# Altium PCB driver.PcbDoc
Units mil, origin at the board's own origin, x right, y up, seen from the top; angles counter-clockwise.
Board outline 1401.57 x 1050 mil, 4 copper layers (Top, Layer 2, Layer 3, Bottom), stack 71.112 mil thick; 86 components, 50 nets, 252 pads, 64 vias.
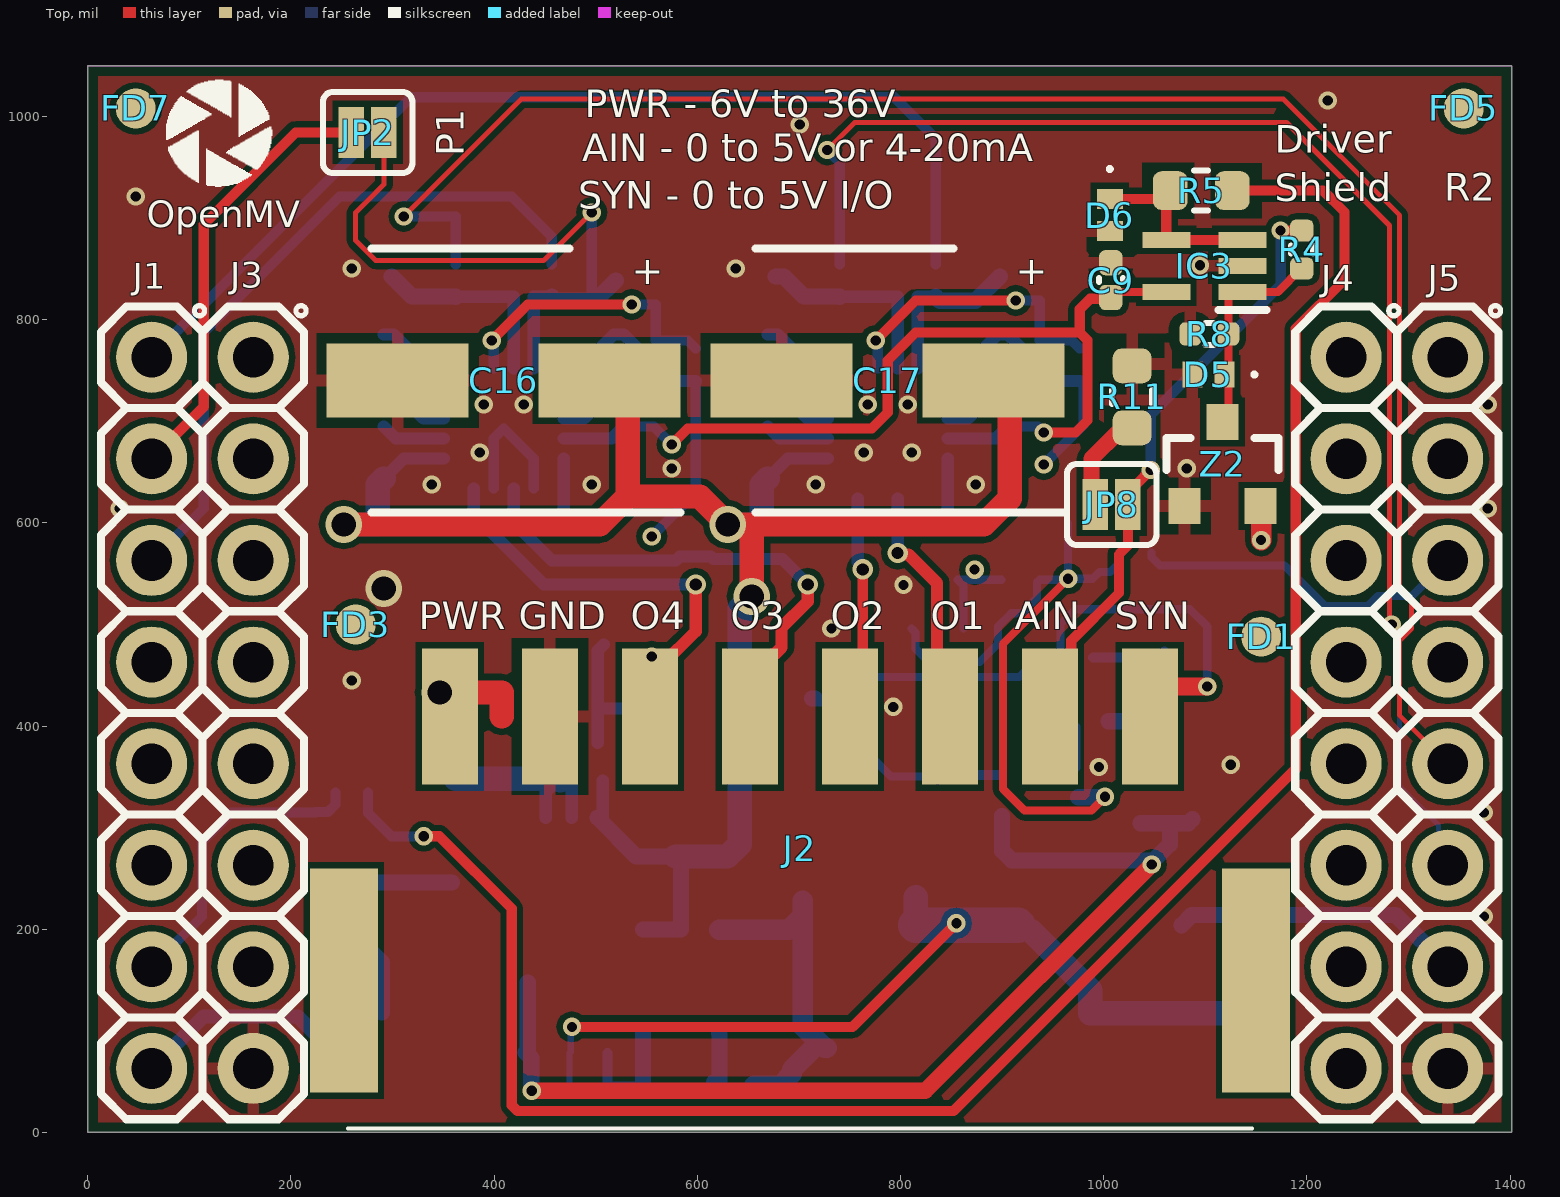
[diagram p0: Top view]
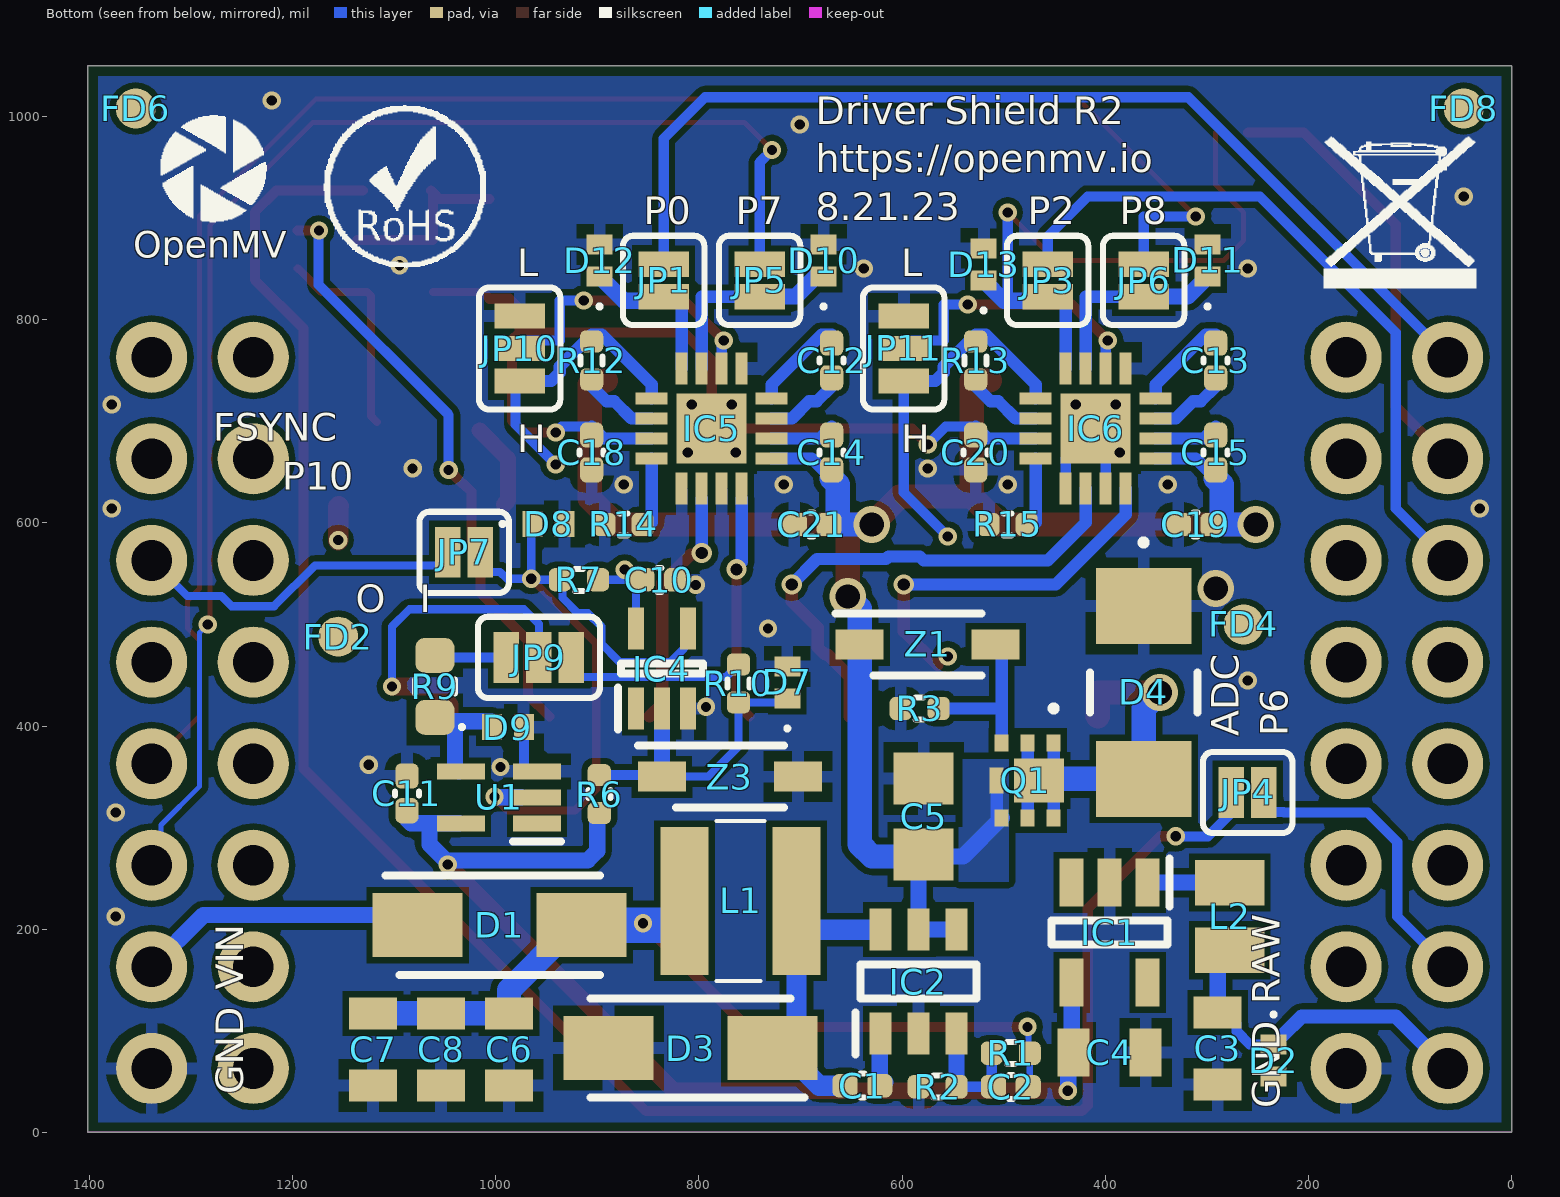
[diagram p1: Bottom view, seen from below]
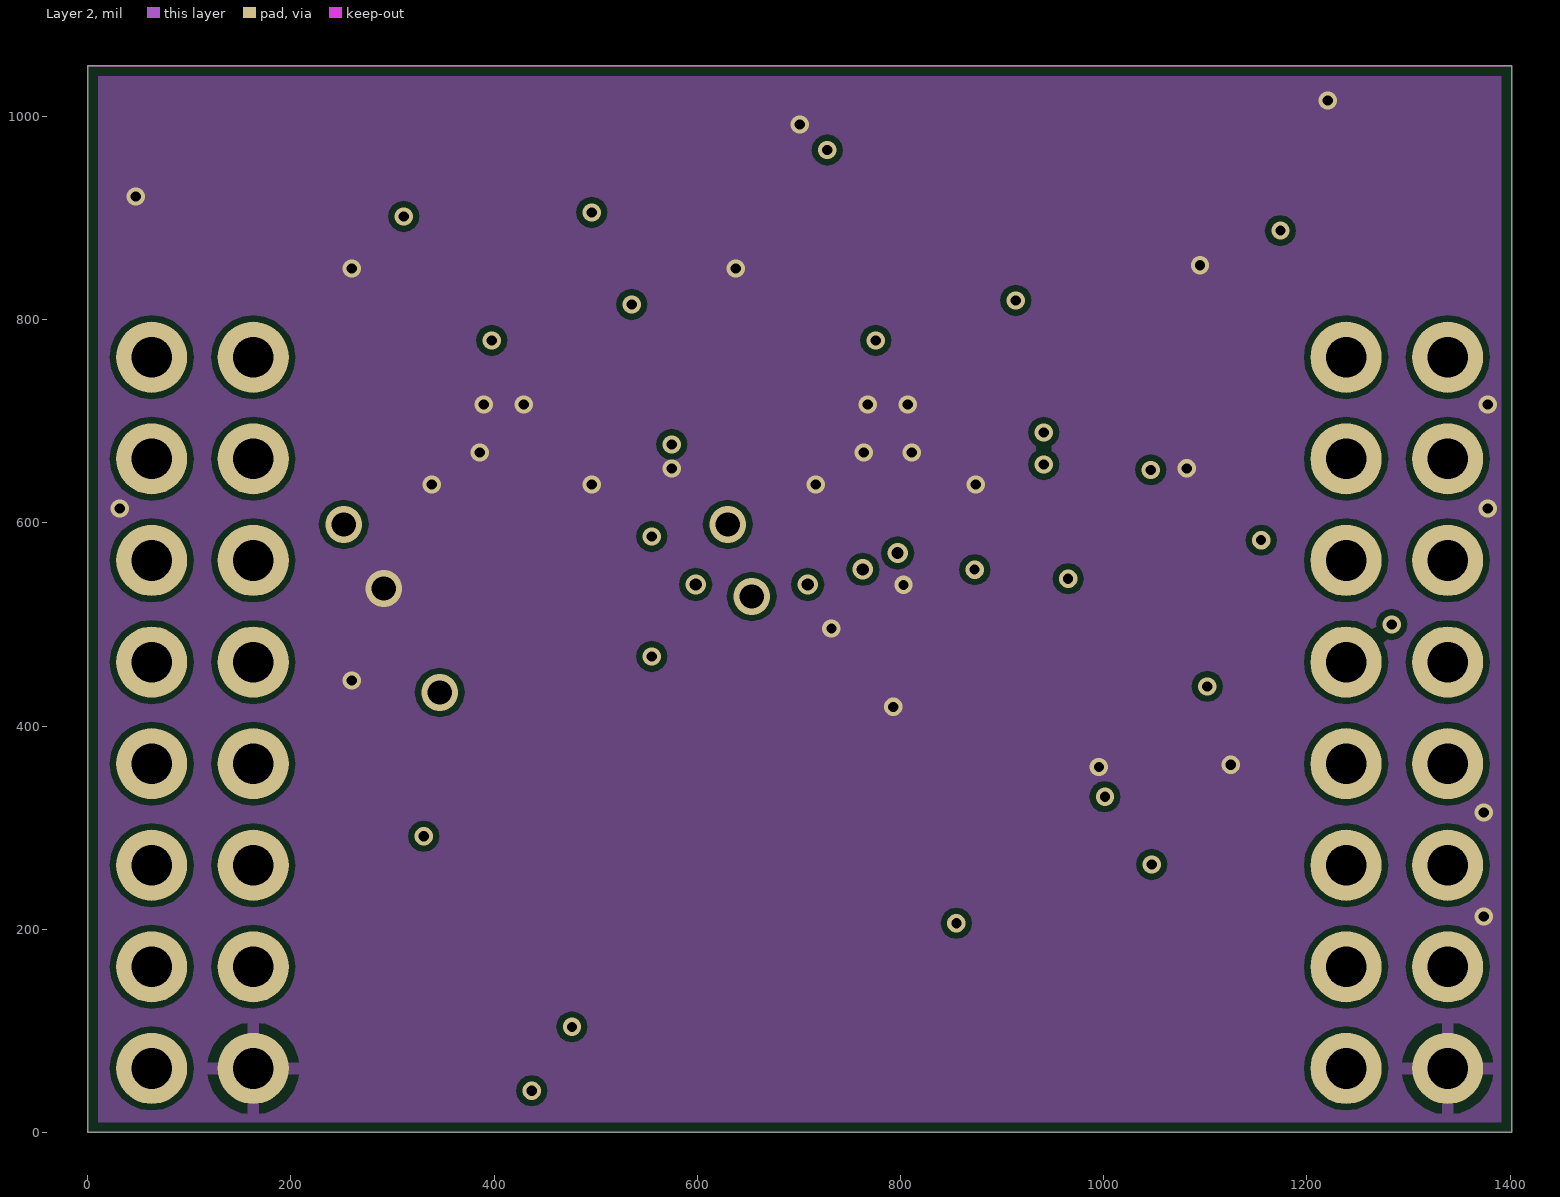
[diagram p2: Layer 2]
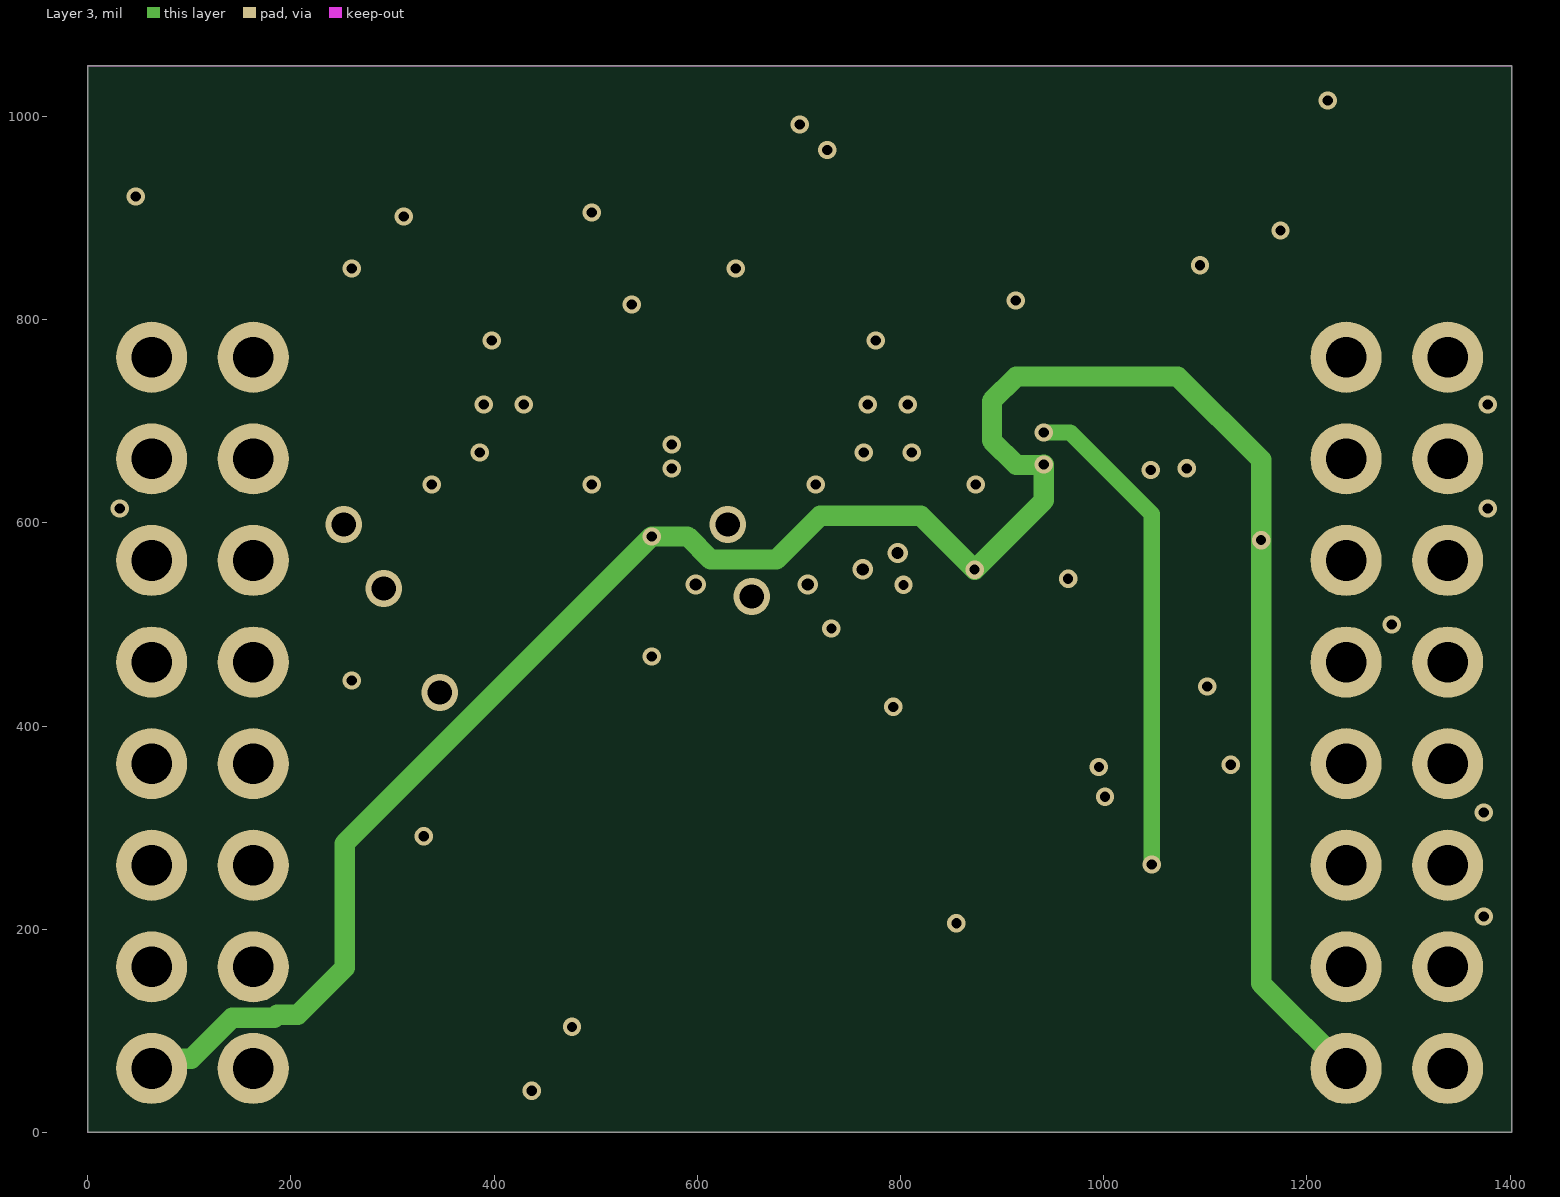
[diagram p3: Layer 3]
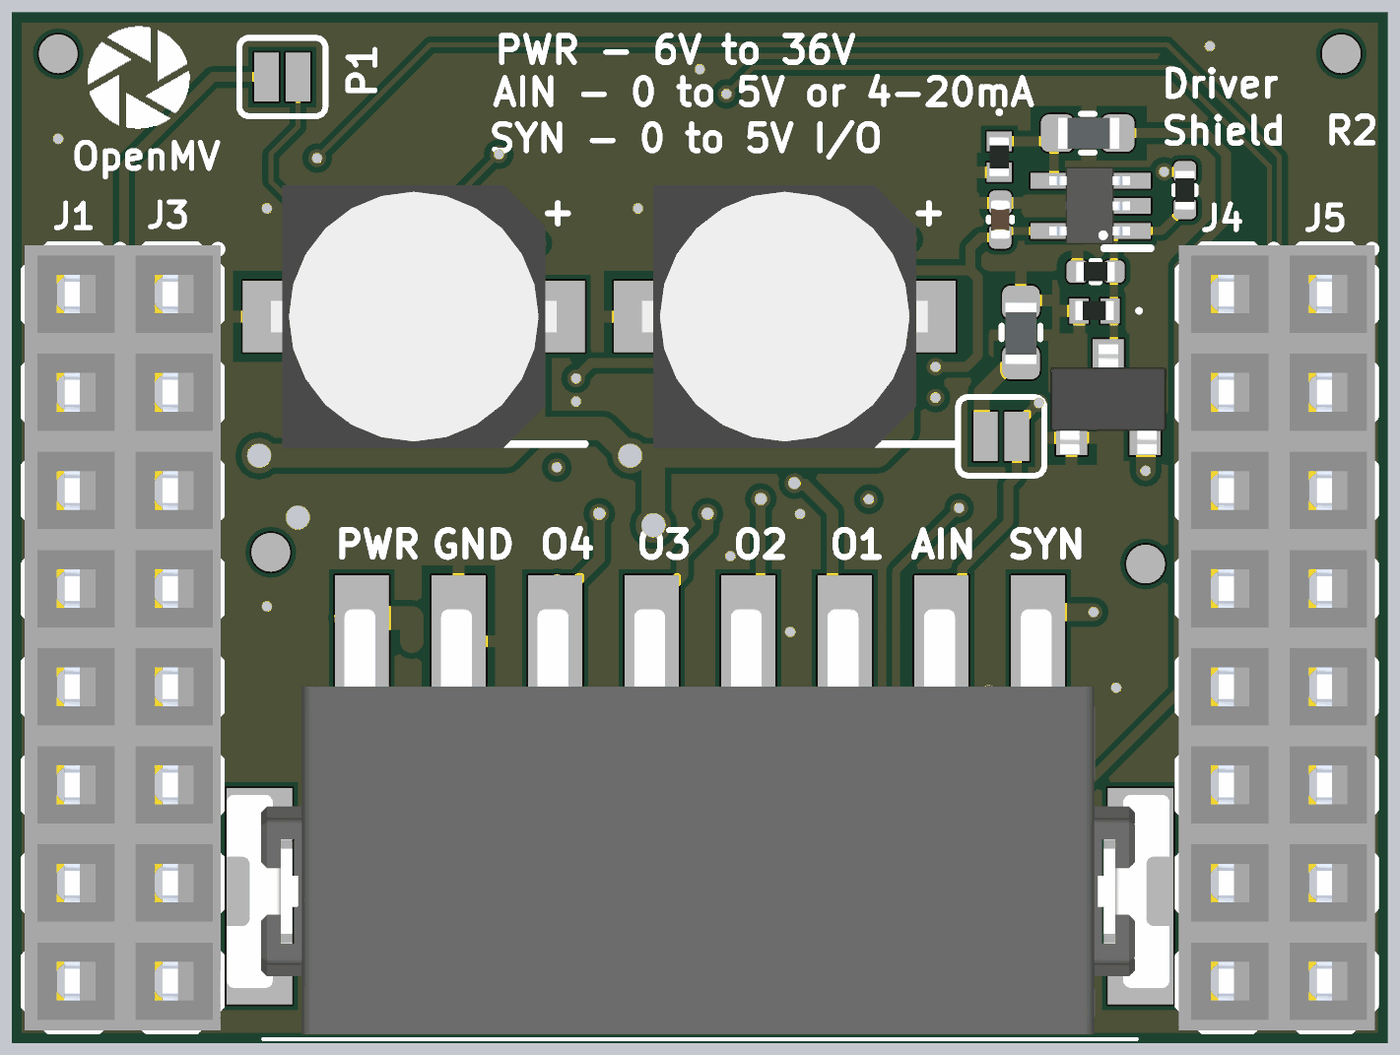
[diagram p4: 3D render of the assembled board from above, using the file's embedded part models]
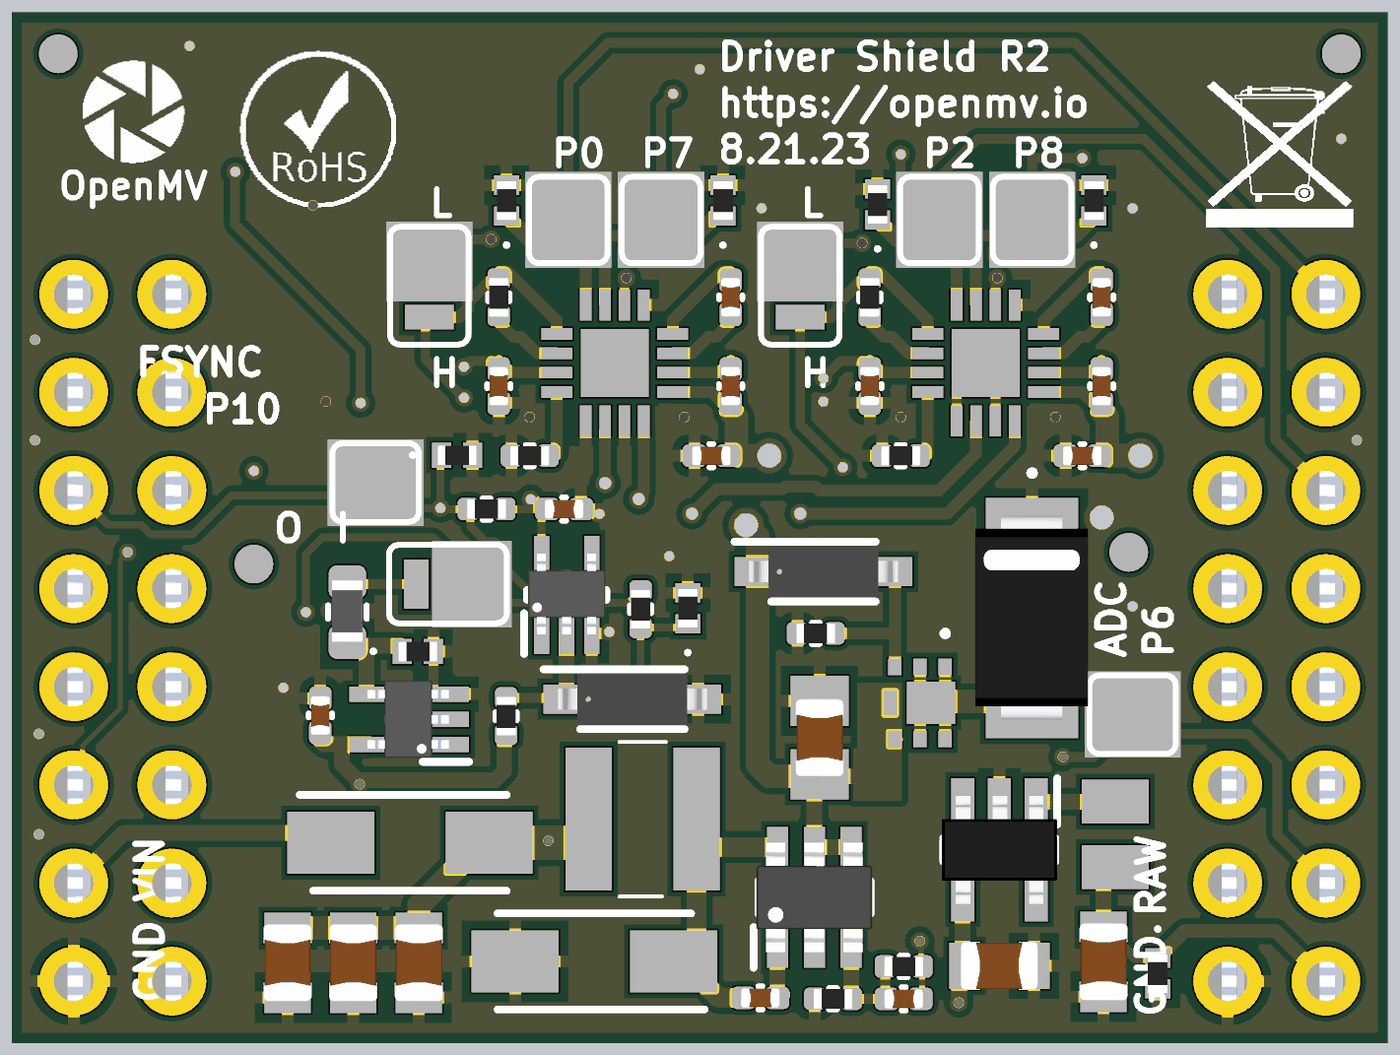
[diagram p5: 3D render of the assembled board from below, using the file's embedded part models]

## Layer stack, top to bottom
Top Solder: solder mask 0.4, Solder Resist, Dk 3.5
Top: signal copper 1.378
Dielectric 2: prepreg 2.8, PP-006, Dk 4.1
Layer 2: signal copper 1.378
Dielectric 1: dielectric 60, FR-4, Dk 4.8
Layer 3: signal copper 1.378
Dielectric 5: prepreg 2.8, PP-006, Dk 4.1
Bottom: signal copper 1.378
Bottom Solder: solder mask 0.4, Solder Resist, Dk 3.5

## Board outline
0,1050 0,0 1401.57,0 1401.57,1050

## Design rules (kind name [scope] priority, off if disabled: settings)
BoardOutlineClearance mdCopperDimension [All] p1: gap=10 ignorepadtopadclearanceinfootprint=FALSE except(0: Arc-SplitContinuation Track-SplitContinuation SMDPad-SplitContinuation THPad-SplitContinuation Via-SplitContinuation Fill-SplitContinuation Poly-SplitContinuation Region-SplitContinuation Text-SplitContinuation)
Clearance Clearance_for_PolygonClass_Isolate_6 [InPolygonClass('Isolate_6') vs IsArc Or IsTrack Or IsPad Or IsVia Or IsFill Or IsRegion Or IsText] p1: gap=6 ignorepadtopadclearanceinfootprint=FALSE
Clearance Clearance_for_NetClass_hipwr [InNetClass('hipwr') vs InNetClass('hipwr')] p2: gap=10 ignorepadtopadclearanceinfootprint=FALSE except(8: SMDPad-SMDPad)
Clearance [All] p3: gap=5 ignorepadtopadclearanceinfootprint=FALSE
ComponentClearance [not InComponent('J1')] p1: gap=0 collisioncheckmode=3 verticalgap=0 showdistances=FALSE
HoleSize HoleSize_For_NetClass_hipwr [InNetClass('hipwr')] p1: absolutevalues=TRUE maxlimit=10 minlimit=10 maxpercent=80.000 minpercent=20.000
HoleSize HoleSize_For_NetClass_signal [InNetClass('signal')] p2: absolutevalues=TRUE maxlimit=10 minlimit=10 maxpercent=80.000 minpercent=20.000
HoleSize HoleSize_For_NetClass_pwr [InNetClass('pwr')] p3: absolutevalues=TRUE maxlimit=10 minlimit=10 maxpercent=80.000 minpercent=20.000
HoleSize HoleSize_For_NetClass_gnd [InNetClass('gnd')] p4: absolutevalues=TRUE maxlimit=10 minlimit=10 maxpercent=80.000 minpercent=20.000
HoleSize [All] p5: absolutevalues=TRUE maxlimit=100000 minlimit=10 maxpercent=80.000 minpercent=20.000
HoleToHoleClearance mdDrill [All] p1: gap=10 allowstackedmicrovias=TRUE
MinimumSolderMaskSliver [All] p1 off: minsoldermaskwidth=10
PasteMaskExpansion Expansion_SMDPaste_OFF [InPadClass('SMDPaste_OFF')] p1: expansion=0
PasteMaskExpansion mlMinCreamFrame [All] p2: expansion=0
PolygonConnect PolygonConnect_For_PolygonThermal_OFF [InPolygonClass('PolygonThermal_OFF')] p1: connectstyle=Direct reliefconductorwidth=10 reliefentries=4 polygonreliefangle="90 Angle" airgapwidth=10
PolygonConnect PolygonConnect_For_PolygonThermal_ON_Width120000_Gap100000 [InPolygonClass('PolygonThermal_ON_Width120000_Gap100000') vs Not IsVia] p2: connectstyle=Relief reliefconductorwidth=12 reliefentries=4 polygonreliefangle="90 Angle" airgapwidth=10
PolygonConnect ThermalVias [IsVia] p3: connectstyle=Direct reliefconductorwidth=10 reliefentries=4 polygonreliefangle="90 Angle" airgapwidth=10
PolygonConnect [All] p4: connectstyle=Relief reliefconductorwidth=10 reliefentries=4 polygonreliefangle="90 Angle" airgapwidth=10
RoutingVias [All] p1: holewidth=10 width=18 viastyle="Through Hole" minholewidth=10 minwidth=18 maxholewidth=100 maxwidth=100
SolderMaskExpansion mlMinStopFrame [All] p1: expansion=2 istentingtop=FALSE
Width [All] p1: maxlimit=200 minlimit=5 preferedwidth=5 minimp=50.000000 maximp=50.000000 favimp=50.000000
25 further rules are at their usual default settings.

## Classes and differential pairs
polygon class PolygonThermal_OFF: Polygon_1_Net_EXT_VIN_INT
polygon class PolygonThermal_ON_Width120000_Gap100000: Polygon_1_Net_GND Polygon_2_Net_GND
polygon class Isolate_6: Polygon_1_Net_GND Polygon_2_Net_GND
pad class SMDPaste_OFF: FD1-1 FD2-1 FD3-1 FD4-1 FD5-1 FD6-1 FD7-1 FD8-1 JP1-1 JP1-2 JP2-1 JP2-2 JP3-1 JP3-2 JP4-1 JP4-2 JP5-1 JP5-2 JP6-1 JP6-2 JP7-1 JP7-2 JP8-1 JP8-2 JP9-1 JP9-2 JP9-3 JP10-1 JP10-2 JP10-3 JP11-1 JP11-2 JP11-3

## Components (designator, comment, footprint, x,y, rotation, side; value= is the part's Value field where it differs from the comment)
C1 "0.1uF" 0402-CAP 639,46 r0 bottom
C2 "100pF" 0402-CAP 493,45 r0 bottom
C3 "22uF" 0805 289.34,82.68 r90 bottom
C4 "22uF" 0805 395.64,78.74 r0 bottom
C5 "10uF" C0805 578.74,311.02 r90 bottom
C6 "22uF" 0805 986.87,81.74 r90 bottom
C7 "22uF" 0805 1120.72,81.74 r90 bottom
C8 "22uF" 0805 1053.8,81.74 r90 bottom
C9 "0.1uF" 0402-CAP 1007,839 r270 top
C10 "0.1uF" 0402-CAP 839,544 r0 bottom
C11 "0.1uF" 0402-CAP 1087.35,333.77 r270 bottom
C12 "22nF" 0402-CAP 669.29,759.84 r90 bottom
C13 "22nF" 0402-CAP 291.34,759.84 r90 bottom
C14 "0.1uF" 0402-CAP 669.29,669.29 r90 bottom
C15 "0.1uF" 0402-CAP 291.34,669.29 r90 bottom
C16 "EMZR500ARA101MF80G" CAPAE660X820N 409.45,740.16 r180 top
C17 "EMZR500ARA101MF80G" CAPAE660X820N 787.4,740.16 r180 top
C18 "0.1uF" 0402-CAP 905.51,669.29 r90 bottom
C19 "0.1uF" 0402-CAP 311.02,598.43 r180 bottom
C20 "0.1uF" 0402-CAP 527.56,669.29 r90 bottom
C21 "0.1uF" 0402-CAP 688.98,598.43 r180 bottom
D1 "FM240A" DIOM5025X231N 996,204 r180 bottom
D2 "CPDQT5V0HE-HF" CPDQT5V0HEHF 234.22,70.87 r270 bottom
D3 "FM240A" DIOM5025X231N 808.18,83.15 r0 bottom
D4 "SMAJ40CAE3_TR13" SMAJ40CAE3TR13 362.2,433.07 r270 bottom
D5 "CPDQT5V0HE-HF" CPDQT5V0HEHF 1103,746 r180 top
D6 "CPDQT5V0HE-HF" CPDQT5V0HEHF 1006,903 r270 top
D7 "CPDQT5V0HE-HF" CPDQT5V0HEHF 713,443 r90 bottom
D8 "CPDQT5V0HE-HF" CPDQT5V0HEHF 948,599 r180 bottom
D9 "CPDQT5V0HE-HF" CPDQT5V0HEHF 988,399 r180 bottom
D10 "CPDQT5V0HE-HF" CPDQT5V0HEHF 677.17,858.27 r90 bottom
D11 "CPDQT5V0HE-HF" CPDQT5V0HEHF 299.21,858.27 r90 bottom
D12 "CPDQT5V0HE-HF" CPDQT5V0HEHF 897.64,858.27 r90 bottom
D13 "CPDQT5V0HE-HF" CPDQT5V0HEHF 519.68,854.33 r90 bottom
FD1 "FIDUCIAL1X2" FIDUCIAL-1X2 1155,488 r0 top
FD2 "FIDUCIAL1X2" FIDUCIAL-1X2 1155,488 r180 bottom
FD3 "FIDUCIAL1X2" FIDUCIAL-1X2 263.78,500 r0 top
FD4 "FIDUCIAL1X2" FIDUCIAL-1X2 263.78,500 r180 bottom
FD5 "FIDUCIAL1X2" FIDUCIAL-1X2 1354.33,1007.87 r0 top
FD6 "FIDUCIAL1X2" FIDUCIAL-1X2 1354.33,1007.87 r180 bottom
FD7 "FIDUCIAL1X2" FIDUCIAL-1X2 47.24,1007.87 r0 top
FD8 "FIDUCIAL1X2" FIDUCIAL-1X2 47.24,1007.87 r180 bottom
IC1 "TPS613222ADBVR" SOT95P280X145-5N 395.64,196.85 r270 bottom
IC2 "AP64060WU-7" SOT95P280X100-6N 583.91,148.51 r90 bottom
IC3 "LM321LVIDCKR" SOT65P210X110-5N 1099,853 r180 top
IC4 "74LVC1G07GW,125" SOT65P212X110-5N 836.38,456.57 r90 bottom
IC5 "DRV8876RGTR" QFN50P300X300X100-17N 787.4,692.91 r180 bottom
IC6 "DRV8876RGTR" QFN50P300X300X100-17N 409.45,692.91 r180 bottom
J1 "SSQ-108-03-T-S" HDR_1X8 62.99,762.99 r0 top
J2 "1771088" 1771088 701,409.45 r0 top locked
J3 "SSQ-108-03-T-S" HDR_1X8 162.99,762.99 r0 top
J4 "SSQ-108-03-T-S" HDR_1X8 1238.58,762.99 r0 top
J5 "SSQ-108-03-T-S" HDR_1X8 1338.58,762.99 r0 top
JP1 "JUMPER-SMT_2_NC_PASTE_SILK" SMT-JUMPER_2_NC_PASTE_SILK 834.65,838.58 r270 bottom
JP2 "JUMPER-SMT_2_NO_SILK" SMT-JUMPER_2_NO_SILK 275.59,984.25 r0 top
JP3 "JUMPER-SMT_2_NC_PASTE_SILK" SMT-JUMPER_2_NC_PASTE_SILK 456.69,838.58 r270 bottom
JP4 "JUMPER-SMT_2_NC_PASTE_SILK" SMT-JUMPER_2_NC_PASTE_SILK 259.84,334.65 r0 bottom
JP5 "JUMPER-SMT_2_NC_PASTE_SILK" SMT-JUMPER_2_NC_PASTE_SILK 740.16,838.58 r270 bottom
JP6 "JUMPER-SMT_2_NC_PASTE_SILK" SMT-JUMPER_2_NC_PASTE_SILK 362.2,838.58 r270 bottom
JP7 "JUMPER-SMT_2_NC_PASTE_SILK" SMT-JUMPER_2_NC_PASTE_SILK 1031,571 r180 bottom
JP8 "JUMPER-SMT_2_NO_SILK" SMT-JUMPER_2_NO_SILK 1007.87,618.11 r0 top
JP9 "JUMPER-SMT_3_1-NC_PASTE_SILK" SMT-JUMPER_3_1-NC_PASTE_SILK 957.43,467.63 r180 bottom
JP10 "JUMPER-SMT_3_1-NC_PASTE_SILK" SMT-JUMPER_3_1-NC_PASTE_SILK 976.38,771.65 r90 bottom
JP11 "JUMPER-SMT_3_1-NC_PASTE_SILK" SMT-JUMPER_3_1-NC_PASTE_SILK 598.43,771.65 r90 bottom
L1 "NRS4018T100MDGJ" NRS4018T100MDGJ 759,228 r0 bottom
L2 "MAKK2016T2R2M" INDC2016X100N 277.53,212.6 r90 bottom
Q1 "BUK6D120-60PX" BUK6D12060PX 476.38,346.46 r90 bottom
R1 "133K" 0402-RES 493,78 r0 bottom
R2 "22.1K" 0402-RES 565,45.04 r0 bottom
R3 "100K" 0402-RES 582.68,417.32 r0 bottom
R4 "51K" 0402-RES 1195,869 r90 top
R5 "470" R0603 1097,927 r0 top
R6 "100K" 0402-RES 898,333 r90 bottom
R7 "100K" 0402-RES 918,544 r0 bottom
R8 "100K" 0402-RES 1104,786 r180 top
R9 "470" R0603 1059.79,440.07 r90 bottom
R10 "10K" 0402-RES 761,442 r90 bottom
R11 "240" R0603 1028,723 r270 top
R12 "100K" 0402-RES 905.51,759.84 r270 bottom
R13 "100K" 0402-RES 527.56,759.84 r270 bottom
R14 "1.69K" 0402-RES 874.02,598.43 r0 bottom
R15 "1.69K" 0402-RES 496.06,598.43 r0 bottom
U1 "74LVC1G17SE-7" SOT65P210X110-5N 996.8,329.83 r0 bottom
Z1 "MMSZ5231B-7-F" SOD3716X145N 574.8,480.32 r180 bottom
Z2 "BAT54S_R1_00001" SOT23-3 1117,656 r0 top
Z3 "MMSZ5231B-7-F" SOD3716X145N 769.45,350.27 r180 bottom

## Footprints (in the part's own frame and the unit in brackets; to place one, negate y for a bottom-side part, rotate by r counter-clockwise, add the part's x,y. Pads: shape width x height; smd on the part's side, far side on the other; paste and mask are expansions set on the pad)
0402-CAP [mm] "Chip Capacitor, 2-Leads, Body  0402 (in) 1005 (mm), IPC Medium Density"
  rrect52% 0.63x0.58 smd mask+0.05: 1(-0.435,0) 2(0.435,0)
  silkscreen extent -0.05,-0.3 0.05,0.3, body extent -0.5,-0.25 0.5,0.25, height 0.5
0402-RES [mm] "Chip Resistor, 2-Leads, Body  0402 (in) 1005 (mm), IPC Medium Density"
  rrect51% 0.55x0.58 smd mask+0.05: 1(-0.475,0) 2(0.475,0)
  silkscreen extent -0.1,-0.28 0.1,0.28, body extent -0.5,-0.25 0.5,0.25, height 0.34
0805 [mil] "0805"
  rect 31.5x47.24 smd: 1(-35.43,0) 2(35.43,0)
  body extent -39,-25 39,25, height 49
1771088 [mm] "1771088"
  rect 1.4x3.4 smd: 1(-8.75,0) 2(-6.25,0) 3(-3.75,0) 4(-1.25,0) 5(1.25,0) 6(3.75,0) 7(6.25,0) 8(8.75,0)
  rect 1.7x5.6 smd: 9(-11.4,-6.6) 10(11.4,-6.6)
  silkscreen extent -11.3,-10.3 11.3,-10.3, body extent -12.25,-10.18 12.15,0.82, height 5.1
BUK6D12060PX [mm] "BUK6D12060PX"
  rect 0.43x0.35 smd: 1(0.935,-0.65) 2(0.935,0) 3(0.935,0.65) 4(-0.935,0.65) 5(-0.935,0) 6(-0.935,-0.65)
  rect 1.1x1.25 smd: 7(0,-0.285)
  rect 0.66x0.35 smd: 8(0,0.775)
  silkscreen extent 1.75,-0.7 1.85,-0.6, body extent -1,-1 1,1, height 0.65
C0805 [mil] "C0805"
  rect 51.18x59.06 smd: 1(-37.4,0) 2(37.4,0)
  body extent -39,-25 39,25, height 49
CAPAE660X820N [mm] "CAPAE660X820N"
  rect 3.55x1.85 smd: 1(-2.65,0) 2(2.65,0)
  silkscreen extent -4.42,-3.3 3.3,3.3, body extent -3.7,-3.4 3.7,3.4, height 8.05
CPDQT5V0HEHF [mm] "CPDQT5V0HEHF"
  rect 0.5x0.65 smd: 1(-0.4,0) 2(0.4,0)
  silkscreen extent -1.2,-0.05 -1.1,0.05, body extent -0.5,-0.25 0.5,0.25, height 0.34
DIOM5025X231N [mil] "DIOM5025X231N"
  rect 88.58x62.99 smd: 1(-80.71,0) 2(80.71,0)
  silkscreen extent -112,-49 98,49, body extent -89,-48 89,50, height 79
FIDUCIAL-1X2 [mm] "FIDUCIAL-1X2"
  rrect100% 1x1 smd paste+0: 1(0,0)
HDR_1X8 [mil]
  round 70 hole 40: 1(0,0) 2(0,-100) 3(0,-200) 4(0,-300) 5(0,-400) 6(0,-500) 7(0,-600) 8(0,-700)
  silkscreen extent -50,-750 52,51, body extent -50,-750 50,50, height 335
INDC2016X100N [mm] "INDC2016X100N"
  rect 1.14x1.73 smd: 1(-0.847,0) 2(0.847,0)
  body extent -1,-0.8 1,0.8, height 1
NRS4018T100MDGJ [mm] "NRS4018T100MDGJ"
  rect 1.2x3.7 smd: 1(-1.4,0) 2(1.4,0)
  silkscreen extent -0.6,-2 0.6,2, body extent -2,-2 2,2, height 1.8
QFN50P300X300X100-17N [mil] "QFN50P300X300X100-17N"
  rect 31.5x11.81 smd: 1(-59.06,29.53) 2(-59.06,9.84) 3(-59.06,-9.84) 4(-59.06,-29.53) 9(59.06,-29.53) 10(59.06,-9.84) 11(59.06,9.84) 12(59.06,29.53)
  rect 11.81x31.5 smd: 5(-29.53,-59.06) 6(-9.84,-59.06) 7(9.84,-59.06) 8(29.53,-59.06) 13(29.53,59.06) 14(9.84,59.06) 15(-9.84,59.06) 16(-29.53,59.06)
  rect 68.9x68.9 smd: 17(0,0)
  body extent -59,-59 59,59, height 26
R0603 [mm] "R0603"
  rrect51% 0.87x0.97 smd mask+0.05: 1(-0.8,0) 2(0.75,0)
  silkscreen extent -0.2,-0.5 0.15,0.5, body extent -0.8,-0.4 0.8,0.4, height 0.45
SMAJ40CAE3TR13 [mm] "SMAJ40CAE3TR13"
  rect 1.9x2.39 smd: 1(-2.16,0) 2(2.16,0)
  silkscreen extent -3.8,-1.34 0.5,1.34, body extent -2.65,-1.47 2.63,1.45, height 2.41
SMT-JUMPER_2_NC_PASTE_SILK [mil] "SMT-JUMPER_2_NC_PASTE_SILK"
  rect 25x50 smd paste+0: 1(-16,0) 2(16,0)
  silkscreen extent -44,-40 44,40
SMT-JUMPER_2_NO_SILK [mil] "SMT-JUMPER_2_NO_SILK"
  rect 25x50 smd paste+0: 1(-16,0) 2(16,0)
  silkscreen extent -44,-40 44,40
SMT-JUMPER_3_1-NC_PASTE_SILK [mil] "SMT-JUMPER_3_1-NC_PASTE_SILK"
  rect 25x50 smd paste+0: 1(-32,0) 2(0,0) 3(32,0)
  silkscreen extent -60,-40 60,40
SOD3716X145N [mil] "SOD3716X145N"
  rect 47.24x29.53 smd: 1(-66.93,0) 2(66.93,0)
  silkscreen extent -91,-31 53,31, body extent -76,-27 76,27, height 32
SOT23-3 [mil] "SOT23-3"
  rect 31.5x35.43 smd: 1(-37.4,-39.37) 2(37.4,-39.37) 3(0,43.31)
  silkscreen extent -55,-4 55,28, body extent -59,-56 59,56, height 47
SOT65P210X110-5N [mm] "SOT65P210X110-5N"
  rect 1.2x0.4 smd: 1(-0.95,0.65) 2(-0.95,0) 3(-0.95,-0.65) 4(0.95,-0.65) 5(0.95,0.65)
  silkscreen extent -1.55,1.1 -0.35,1.1, body extent -1.02,-1 1.07,1, height 0.96
SOT65P212X110-5N [mm] "SOT65P212X110-5N"
  rect 1.05x0.4 smd: 1(-1,0.65) 2(-1,0) 3(-1,-0.65) 4(1,-0.65) 5(1,0.65)
  silkscreen extent -1.53,-1.02 0.12,1.1, body extent -1.02,-1 1.07,1, height 0.96
SOT95P280X100-6N [mil] "SOT95P280X100-6N"
  rect 41.34x21.65 smd: 1(-51.18,37.4) 2(-51.18,0) 3(-51.18,-37.4) 4(51.18,-37.4) 5(51.18,0) 6(51.18,37.4)
  silkscreen extent -72,-57 17,62, body extent -56,-59 56,59, height 44
SOT95P280X145-5N [mil] "SOT95P280X145-5N"
  rect 47.24x23.62 smd: 1(-49.21,37.4) 2(-49.21,0) 3(-49.21,-37.4) 4(49.21,-37.4) 5(49.21,37.4)
  silkscreen extent -73,-57 12,59, body extent -55,-59 55,59, height 46

## Part data
C1 C9 C10 C11 C14 C15 C18 C19 C20 C21: library part CAP0402-CAP, "CapacitorStandard 0603 ceramic capacitor, and 0.1\" leaded capacitor.", MPN=GRM155R71H104KE14D, DeviceName=0402-CAP, DeviceSetName=CAP, GateName_1=G$1, LibraryName=sfe, SymbolName_1=CAP
C2: library part CAP0402-CAP, "CapacitorStandard 0603 ceramic capacitor, and 0.1\" leaded capacitor.", MPN=CC0402JRNPO9BN101, DeviceName=0402-CAP, DeviceSetName=CAP, GateName_1=G$1, LibraryName=sfe, SymbolName_1=CAP
C3 C4 C6 C7 C8: library part 22UF-0805-6.3V-20%, "22ÂµF ceramic capacitors    A capacitor is a passive two-terminal electrical component used to store electrical energy temporarily in an electric field.", MPN=CL21A226MQQNNNE, DeviceName=-0805-6.3V-20%, DeviceSetName=22UF, GateName_1=G$1, LibraryName=SparkFun-Capacitors, PROD_ID=CAP-08402, SymbolName_1=CAP
C5: library part C-EUC0805, "CAPACITOR, European symbol", MPN=GRM21BR61H106KE43K, DeviceName=C0805, DeviceSetName=C-EU, GateName_1=G$1, LibraryName=rcl, POPULARITY=88, SPICEPREFIX=C, SymbolName_1=C-EU
C12 C13: library part CAP0402-CAP, "CapacitorStandard 0603 ceramic capacitor, and 0.1\" leaded capacitor.", MPN=GRM155R71H223KA12D, DeviceName=0402-CAP, DeviceSetName=CAP, GateName_1=G$1, LibraryName=sfe, SymbolName_1=CAP
C16 C17: "Aluminum Electrolytic Capacitors - SMD 100uF 50V 20%   Source:  Datasheet", MANUFACTURER_NAME=Chemi-Con, DeviceSetName=EMZR500ARA101MF80G, GateName_1=G$1, HEIGHT=8.2mm, LibraryName=EMZR500ARA101MF80G, MANUFACTURER_PART_NUMBER=EMZR500ARA101MF80G, MOUSER_PART_NUMBER=661-EMZR500ARA101MF8, MOUSER_PRICE-STOCK=https://www.mouser.co.uk/ProductDetail/United-Chemi-Con/EMZR500ARA101MF80G?qs=y6ZabgHbY%252ByQ3zUEIlMmqw%3D%3D, MPN=EMZR500ARA101MF80G, SymbolName_1=EMZR500ARA101MF80G
D1 D3: "Diodes - General Purpose, Power, Switching GP Si Rectifier SMB,2A,40V   Source:  Datasheet", MANUFACTURER_NAME=Rectron, DeviceSetName=FM240A, GateName_1=G$1, HEIGHT=2.31mm, LibraryName=FM240A, MANUFACTURER_PART_NUMBER=FM240A, MOUSER_PART_NUMBER=583-FM240A, MOUSER_PRICE-STOCK=https://www.mouser.co.uk/ProductDetail/Rectron/FM240A?qs=7pEAo90IqNG7sknZwmLYhQ%3D%3D, MPN=FM240A, SymbolName_1=FM240A
D2 D5 D6 D7 D8 D9 D10 D11 D12 D13: "ESD Suppressors / TVS Diodes DIODE ESD 5VWM 65W 0402/SOD-923F   Source:  Datasheet", MANUFACTURER_NAME="Comchip Technology", DeviceSetName=CPDQT5V0HE-HF, GateName_1=G$1, HEIGHT=0.42mm, LibraryName=CPDQT5V0HE-HF, MANUFACTURER_PART_NUMBER=CPDQT5V0HE-HF, MOUSER_PART_NUMBER=MOUSER_PART_NUMBER, MOUSER_PRICE-STOCK=MOUSER_PRICE-STOCK, MPN=CPDQT5V0HE-HF, SymbolName_1=CPDQT5V0HE-HF
D4: "ESD Suppressors / TVS Diodes TVS   Source:  Datasheet", MANUFACTURER_NAME=Microchip, MANUFACTURER_PART_NUMBER=SMAJ40CAe3/TR13, DeviceSetName=SMAJ40CAE3_TR13, GateName_1=G$1, HEIGHT=3.05mm, LibraryName=SMAJ40CAe3_TR13, MOUSER_PART_NUMBER=494-SMAJ40CAE3/TR13, MOUSER_PRICE-STOCK=https://www.mouser.co.uk/ProductDetail/Microchip-Technology/SMAJ40CAe3-TR13?qs=pU29NIZ4ZwCw3PnlxOleOw%3D%3D, MPN=SMAJ40CAe3/TR13, SymbolName_1=SMAJ40CAE3_TR13
FD1 FD2 FD3 FD4 FD5 FD6 FD7 FD8: "Fiducial Alignment Points    Point-of-reference for pick-and-place machines and other optical instruments.", DeviceName=1X2, DeviceSetName=FIDUCIAL, GateName_1=G$1, LibraryName=SparkFun-Aesthetics, SymbolName_1=FIDUCIAL
IC1: "6-uA Quiescent Current, 1.8-A Switch Current Boost Converter   Source:  Datasheet", MANUFACTURER_NAME="Texas Instruments", DeviceSetName=TPS613222ADBVR, GateName_1=G$1, HEIGHT=1.45mm, LibraryName=TPS613222ADBVR, MANUFACTURER_PART_NUMBER=TPS613222ADBVR, MOUSER_PART_NUMBER=595-TPS613222ADBVR, MOUSER_PRICE-STOCK=https://www.mouser.co.uk/ProductDetail/Texas-Instruments/TPS613222ADBVR?qs=W0yvOO0ixfE4d69WXsn8NQ%3D%3D, MPN=TPS613222ADBVR, SymbolName_1=TPS613222ADBVR
IC2: "Switching Voltage Regulators DCDC Conv HV Buck TSOT26(STD) T&R 3K   Source:  Datasheet", MANUFACTURER_NAME="Diodes Inc.", DeviceSetName=AP64060WU-7, GateName_1=G$1, HEIGHT=1mm, LibraryName=AP64060WU-7, MANUFACTURER_PART_NUMBER=AP64060WU-7, MOUSER_PART_NUMBER=621-AP64060WU-7, MOUSER_PRICE-STOCK=https://www.mouser.co.uk/ProductDetail/Diodes-Incorporated/AP64060WU-7?qs=Li%252BoUPsLEntiZYjFw%252BCbiQ%3D%3D, MPN=AP64060WU-7, SymbolName_1=AP64060WU-7
IC3: "1-Channel industry standard low voltage operational amplifier   Source:  Datasheet", MANUFACTURER_NAME="Texas Instruments", DeviceSetName=LM321LVIDCKR, GateName_1=G$1, HEIGHT=1.1mm, LibraryName=LM321LVIDCKR, MANUFACTURER_PART_NUMBER=LM321LVIDCKR, MOUSER_PART_NUMBER=595-LM321LVIDCKR, MOUSER_PRICE-STOCK=https://www.mouser.co.uk/ProductDetail/Texas-Instruments/LM321LVIDCKR?qs=qSfuJ%252Bfl%2Fd6RcyTOjkRx5Q%3D%3D, MPN=LM321LVIDCKR, SymbolName_1=LM321LVIDCKR
IC4: "74LVC1G07 - Buffer with open-drain output@en-us   Source:  Datasheet", MANUFACTURER_NAME=Nexperia, DeviceSetName=74LVC1G07GW,125, GateName_1=G$1, HEIGHT=1.1mm, LibraryName=74LVC1G07GW_125, MANUFACTURER_PART_NUMBER=74LVC1G07GW,125, MOUSER_PART_NUMBER=771-74LVC1G07GW-G, MOUSER_PRICE-STOCK=https://www.mouser.co.uk/ProductDetail/Nexperia/74LVC1G07GW125?qs=me8TqzrmIYW763Mg%2FG86Uw%3D%3D, MPN=74LVC1G07GW,125, SymbolName_1=74LVC1G07GW,125
IC5 IC6: "Motor / Motion / Ignition Controllers & Drivers 37-V, 3.5-A brushed DC motor driver with integrated current sensing and current sense output 16-VQFN -40 to 125   Source:  Datasheet", MANUFACTURER_NAME="Texas Instruments", DeviceSetName=DRV8876RGTR, GateName_1=G$1, HEIGHT=1mm, LibraryName=DRV8876RGTR, MANUFACTURER_PART_NUMBER=DRV8876RGTR, MOUSER_PART_NUMBER=595-DRV8876RGTR, MOUSER_PRICE-STOCK=https://www.mouser.co.uk/ProductDetail/Texas-Instruments/DRV8876RGTR?qs=T3oQrply3y%2F6lJwB3MIeHA%3D%3D, MPN=DRV8876RGTR, SymbolName_1=DRV8876RGTR
J1 J3 J4 J5: library part HDR_1X8, MANUFACTURER P/N=SSQ-108-03-T-S
J2: "PCB terminal block, nominal current: 6 A, rated voltage (III/2): 160 V, nominal cross section: 0.5 mm?, Number of potentials: 8, Number of rows: 1, Number of positions per row: 8, product range: PTSM 0,5/..-H-SMD, pitch: 2.5 mm, connection method: Push-in spring connection, mounting: SMD soldering, conductor/PCB connection direction: 0 ?, color: black, Pin layout: Linear pad geometry, type of packaging: packed in cardboard   Source:  Datasheet", MANUFACTURER_NAME="Phoenix Contact", DeviceSetName=1771088, GateName_1=G$1, HEIGHT=5.22mm, LibraryName=1771088, MANUFACTURER_PART_NUMBER=1771088, MOUSER_PART_NUMBER=651-1771088, MOUSER_PRICE-STOCK=https://www.mouser.co.uk/ProductDetail/Phoenix-Contact/1771088?qs=Q77YN%2FRrsKIDMojcNKtpFQ%3D%3D, MPN=1771088, SymbolName_1=1771088
JP1 JP3 JP4 JP5 JP6 JP7: "Normally closed solder jumper    This jumper has an aperture in the stencil to allow solder paste to bridge the split in the wire so it's normally closed (NC). Wick off the solder to open the connection. Reapply solder to reclose the connection.", DeviceName=_SILK, DeviceSetName=JUMPER-SMT_2_NC_PASTE, GateName_1=G$1, LibraryName=SparkFun-Jumpers, SymbolName_1=SMT-JUMPER_2_NC_PASTE
JP2 JP8: "Normally open jumper    This jumper has two pads in close proximity to each other. Apply solder to close the connection.   Round pads are easier to solder for beginners, but are a lot larger.   SparkFun Product that uses the round pads:  SparkFun EL Sequencer", DeviceName=_SILK, DeviceSetName=JUMPER-SMT_2_NO, GateName_1=G$1, LibraryName=SparkFun-Jumpers, SymbolName_1=SMT-JUMPER_2_NO
JP9 JP10 JP11: "Normally closed solder jumper (1 of 2 connections)    This jumper has an aperture in the stencil to allow solder paste to bridge one of the two connections. One connection is normally closed (NC), while the other is normally open (NO). Wick off the solder to open the connection. Reapply solder to reclose the connection. Apply solder to the other side instead to change the current path.", DeviceName=_SILK, DeviceSetName=JUMPER-SMT_3_1-NC_PASTE, GateName_1=G$1, LibraryName=SparkFun-Jumpers, SymbolName_1=SMT-JUMPER_3_1-NC_PASTE
L1: "Fixed Inductors 4018 10uH 180mOhms +/-20%Tol 1200mA   Source:  Datasheet", MANUFACTURER_NAME="TAIYO YUDEN", DeviceSetName=NRS4018T100MDGJ, GateName_1=G$1, HEIGHT=1mm, LibraryName=NRS4018T100MDGJ, MANUFACTURER_PART_NUMBER=NRS4018T100MDGJ, MOUSER_PART_NUMBER=963-NRS4018T100MDGJ, MOUSER_PRICE-STOCK=https://www.mouser.co.uk/ProductDetail/TAIYO-YUDEN/NRS4018T100MDGJ?qs=PzICbMaShUeiyHfvjt6KEw%3D%3D, MPN=NRS4018T100MDGJ, SymbolName_1=NRS4018T100MDGJ
L2: "INDUCTOR, METAL CORE Check availability", PACKAGE="2016 Taiyo Yuden", AVAILABILITY="In Stock", DeviceSetName=MAKK2016T2R2M, GateName_1=G$1, LibraryName=MAKK2016T2R2M, MF="Taiyo Yuden", MP=MAKK2016T2R2M, MPN=MAKK2016T2R2M, PRICE=None, PURCHASE-URL=https://pricing.snapeda.com/search/part/MAKK2016T2R2M/?ref=eda, SymbolName_1=MAKK2016T2R2M
Q1: "MOSFET 60V P-CH TRENCHMOS SOT1220   Source:  Datasheet", MANUFACTURER_NAME=Nexperia, DeviceSetName=BUK6D120-60PX, GateName_1=G$1, HEIGHT=0.65mm, LibraryName=BUK6D120-60PX, MANUFACTURER_PART_NUMBER=BUK6D120-60PX, MOUSER_PART_NUMBER=771-BUK6D120-60PX, MOUSER_PRICE-STOCK=https://www.mouser.co.uk/ProductDetail/Nexperia/BUK6D120-60PX?qs=F5EMLAvA7IBtoNC2L3hOcQ%3D%3D, MPN=BUK6D120-60PX, SymbolName_1=BUK6D120-60PX
R1: library part RESISTOR0402-RES, "ResistorBasic schematic elements and footprints for 0603, 1206, and PTH resistors.", MPN=RC0402FR-07133KL, DeviceName=0402-RES, DeviceSetName=RESISTOR, GateName_1=G$1, LibraryName=sfe, SymbolName_1=RESISTOR
R2: library part RESISTOR0402-RES, "ResistorBasic schematic elements and footprints for 0603, 1206, and PTH resistors.", MPN=CR0402-FX-2212GLF, DeviceName=0402-RES, DeviceSetName=RESISTOR, GateName_1=G$1, LibraryName=sfe, SymbolName_1=RESISTOR
R3 R6 R7 R8 R12 R13: library part RESISTOR0402-RES, "ResistorBasic schematic elements and footprints for 0603, 1206, and PTH resistors.", MPN=AC0402FR-07100KL, DeviceName=0402-RES, DeviceSetName=RESISTOR, GateName_1=G$1, LibraryName=sfe, SymbolName_1=RESISTOR
R4: library part RESISTOR0402-RES, "ResistorBasic schematic elements and footprints for 0603, 1206, and PTH resistors.", MPN=RC0402JR-0751KL, DeviceName=0402-RES, DeviceSetName=RESISTOR, GateName_1=G$1, LibraryName=sfe, SymbolName_1=RESISTOR
R5 R9: library part R-US_R0603, "RESISTOR, American symbol", MPN=CR0603-FX-4700ELF, DeviceName=R0603, DeviceSetName=R-US_, GateName_1=G$1, LibraryName=rcl, POPULARITY=77, SPICEPREFIX=R, SymbolName_1=R-US
R10: library part RESISTOR0402-RES, "ResistorBasic schematic elements and footprints for 0603, 1206, and PTH resistors.", MPN=AC0402FR-1310KL, DeviceName=0402-RES, DeviceSetName=RESISTOR, GateName_1=G$1, LibraryName=sfe, SymbolName_1=RESISTOR
R11: library part R-US_R0603, "RESISTOR, American symbol", MPN=RK73B1JTTD241J, DeviceName=R0603, DeviceSetName=R-US_, GateName_1=G$1, LibraryName=rcl, POPULARITY=77, SPICEPREFIX=R, SymbolName_1=R-US
R14 R15: library part RESISTOR0402-RES, "ResistorBasic schematic elements and footprints for 0603, 1206, and PTH resistors.", MPN=RC0402FR-07169RL, DeviceName=0402-RES, DeviceSetName=RESISTOR, GateName_1=G$1, LibraryName=sfe, SymbolName_1=RESISTOR
U1: "DiodesZetex 74LVC1G17SE-7, Buffer, Push-Pull, Non-Inverting, 1.65  5.5 V, 5-Pin SOT-353   Source:  Datasheet", MANUFACTURER_NAME="Diodes Inc.", DeviceSetName=74LVC1G17SE-7, GateName_1=G$1, HEIGHT=1.1mm, LibraryName=74LVC1G17SE-7, MANUFACTURER_PART_NUMBER=74LVC1G17SE-7, MOUSER_PART_NUMBER=621-74LVC1G17SE-7, MOUSER_PRICE-STOCK=https://www.mouser.co.uk/ProductDetail/Diodes-Incorporated/74LVC1G17SE-7?qs=FRHfhEBFk1dzIcstjqNcyA%3D%3D, MPN=74LVC1G17SE-7, SymbolName_1=74LVC1G17SE-7
Z1 Z3: "Zener Diode 5.1V 5% 500mW SOD123 Diodes Inc MMSZ5231B-7-F Zener Diode, 5.1V 5% 0.5 W SMT 2-Pin SOD-123   Source:  Datasheet", MANUFACTURER_NAME="Diodes Inc.", DeviceSetName=MMSZ5231B-7-F, GateName_1=G$1, HEIGHT=1.45mm, LibraryName=MMSZ5231B-7-F, MANUFACTURER_PART_NUMBER=MMSZ5231B-7-F, MOUSER_PART_NUMBER=621-MMSZ5231B-F, MOUSER_PRICE-STOCK=https://www.mouser.co.uk/ProductDetail/Diodes-Incorporated/MMSZ5231B-7-F?qs=2ygBApjwyeMh7Sf0YL1qSw%3D%3D, MPN=MMSZ5231B-7-F, SymbolName_1=MMSZ5231B-7-F

## Via types
v1: diameter 18/18/18/18 (per signal layer), hole 10, Top to Bottom, tented both sides, 32 vias
v2: diameter 18, hole 10, Top to Bottom, tented both sides, 23 vias
v3: diameter 36/36/36/36 (per signal layer), hole 24, Top to Bottom, tented both sides, 5 vias
v4: diameter 20/20/20/20 (per signal layer), hole 12, Top to Bottom, tented both sides, 4 vias

## Nets (pads, with @x,y where several pads share a name; then routed paths per layer and width w, separated by ;. In a path a pad name is that pad's centre, name@x,y a point inside that pad or via, vN(x,y) a via of type N, cw(c..) or ccw(c..) an arc to the next point about the centre after c; other vN are vias at no path point)
AIN: J2.7 JP8.2 R4.2 | length 594.1
  Top w10: J2.7 968.11,430.5 968.11,484.11 1015,531 1015,569 1023.87,577.87 JP8.2 1023.87,630.61 1031.37,638.11 1032.23,638.11 v2(1046.27,652.15) ; v2(1173.97,887.7) R4.2
  Bottom w10: v2(1046.27,652.15) 1046.27,706.27 1174.35,834.35 1174.35,887.31 v2(1173.97,887.7)
AIN_INT: D5.1 IC3.1 R4.1 R8.1 Z2.3 | length 210
  Top w8: Z2.3 1122.7,705.01 R8.1 1122.7,823.53 1126.58,827.41 IC3.1 1171.41,827.41 1194.3,850.3 R4.1
AIN_OUT: D6.1 IC3.3 IC3.4 R5.1 | length 182.2
  Top w10: D6.1 1055.29,918.75 R5.1@1061.6,925.06 ; R5.1@1063.54,927 R5.1@1061.6,925.06 ; IC3.3 IC3.4 R5.1@1061.6,925.06
AIN_S: JP8.1 R11.2 | length 86
  Top w16: JP8.1 987.94,622.05 987.94,663.13 R11.2@1015.75,690.94
CPH0: C12.1 IC5.11 | length 72.1
  Bottom w12: C12.1@669.29,734.25 683.88,719.66 691.56,719.66 708.47,702.76 IC5.11@728.35,702.76
CPH1: C13.1 IC6.11 | length 72.1
  Bottom w12: C13.1@291.34,734.25 305.93,719.66 313.61,719.66 330.52,702.76 IC6.11
CPL0: C12.2 IC5.12 | length 93.2
  Bottom w12: C12.2@669.29,785.43 679.13,785.43 728.35,736.22 IC5.12@728.35,722.44
CPL1: C13.2 IC6.12 | length 93.2
  Bottom w12: C13.2@291.34,785.43 301.18,785.43 350.39,736.22 IC6.12
EXT_VIN: D4.2 J2.1 Q1.1 Q1.2 Q1.5 Q1.6 Q1.7 | length 452.3
  Top w24: v3(346.46,433.07) 407.48,433.07 407.48,409.45
  Bottom w12: Q1.7@440.94,348.03 450.79,357.87 Q1.1 ; Q1.6 450.79,335.24 Q1.7@463.58,348.03 ; Q1.7 Q1.7@476.38,357.68 ; Q1.5 Q1.7@476.38,357.68 ; Q1.2 Q1.7@476.38,357.68
  Bottom w24: v3(346.46,433.07) 362.2,417.32 D4.2 440.94,348.03 463.58,348.03 Q1.7
EXT_VIN_BST: C1.1 IC2.1 | length 58.3
  Bottom w16: C1.1@616.58,49.42 618.46,49.42 C1.1 621.87,96.77 IC2.1
EXT_VIN_FB: C2.2 IC2.3 R1.2 R2.1 | length 123.5
  Bottom w10: R1.2 511.7,46.57 C2.2 545.69,45 R2.1@546.51,44.18
  Bottom w16: R2.1@546.51,44.18 IC2.3
EXT_VIN_G: Q1.3 R3.1 Z1.2 | length 154.6
  Bottom w12: Q1.3 501.97,417.32 ; Z1.2 501.97,474.41 501.97,425.2 501.97,417.32 ; R3.1@557.09,417.32 501.97,417.32
EXT_VIN_INT: C5.1 C14.1 C15.1 C16.1 C17.1 C19.2 C21.2 IC2.4 IC2.5 IC5.9 IC6.9 Q1.4 Q1.8 Z1.1 | length 1879.4
  Top w24: v3(251.97,598.43) 503.94,598.43 531.5,625.98 ; C16.1 531.5,740.16 531.5,625.98 ; v3(653.54,527.56) 653.54,598.43 ; C17.1 907.48,736.22 907.48,624.02 881.89,598.43 653.54,598.43 ; 531.5,625.98 602.36,625.98 v3(629.92,598.43) 653.54,598.43
  Bottom w12: C15.1@291.34,643.7 295.57,647.93 311.02,663.39 IC6.9 ; Q1.4 506.89,309.65 Q1.8 ; C14.1@669.29,643.7 688.98,663.39 IC5.9@728.35,663.39
  Bottom w16: Q1.4 539.96,271.65 578.74,271.65 583.91,266.48 IC2.5 IC2.4
  Bottom w24: v3(251.97,598.43) 285.43,598.43 285.43,637.8 C15.1@291.34,643.7 ; C5.1@578.74,271.65 629.65,271.65 641.73,283.73 Z1.1 641.73,515.75 v3(653.54,527.56) ; v3(629.92,598.43) 663.39,598.43 663.39,637.8 C14.1@669.29,643.7
EXT_VIN_OUT: C2.1 C6.2 C7.2 C8.2 D1.2 L1.2 R1.1 | length 847.8
  Top w10: v2(476.64,103.93) 752.93,103.93 v2(855,206)
  Bottom w6: C2.1 474.3,46.57 R1.1 475.47,79.17 475.47,102.75 v2(476.64,103.93)
  Bottom w24: L1.2@814.9,204 L1.2@814.9,231.56 ; D1.2@929,198 986.87,140.13 C6.2 C8.2 C7.2
  Bottom w35: L1.2@814.9,204 D1.2
EXT_VIN_SW: C1.2 D3.1 IC2.6 L1.1 | length 320.3
  Bottom w20: IC2.6 690.26,199.69 L1.1@703.88,213.31 ; C1.2 681.47,46 693.18,57.72 693.18,61.65 D3.1@714.68,83.15 ; L1.1 L1.1@703.88,213.31 ; D3.1 725.38,83.15 703.88,104.64 L1.1@703.88,213.31
GND: C3.1 C4.1 C5.2 C6.1 C7.1 C8.1 C9.1 C10.1 C11.1 C16.2 C17.2 C18.1 C19.1 C20.1 C21.1 D2.2 D3.2 D4.1 D5.2 D6.2 D7.2 D8.2 D9.2 D10.2 D11.2 D12.2 D13.2 IC1.2 IC2.2 IC3.2 IC4.3 IC5.5 IC5.7 IC5.13 IC5.17 IC6.5 IC6.7 IC6.13 IC6.17 J2.2 J3.8 J5.8 JP10.3 JP11.3 R2.2 R3.2 R8.2 R11.1 R14.2 R15.2 U1.3 Z2.1 Z3.2 | length 188.6
  Bottom w10: IC6.7 399.61,683.07 IC6.17 438.98,663.38 IC6.5 ; U1.3 968.4,355.42 972.25,359.27 D9.2
  other v1: 1374.02,212.6 1374.02,314.96 259.84,444.88 732,496 31.5,614.17 1377.95,614.17 574.8,653.54 385.83,669.29 763.78,669.29 811.02,669.29 389.76,716.54 429.13,716.54 767.72,716.54 807.09,716.54 1377.95,716.54 47.24,921.26 700.79,992.13 1220.47,1015.75
  other v2: 995.28,359.73 1125,362 792.91,418.92 803,539 338.58,637.8 496.06,637.8 716.54,637.8 874.02,637.8 1081.73,653.64 259.84,850.39 637.8,850.39 1094.7,853.55
  other v3: 291.34,535.43
IPROPI0: IC5.4 R14.1 | length 65.8
  Bottom w12: IC5.4 846.46,600.39 R14.1@848.43,598.43
IPROPI1: IC6.4 R15.1 | length 65.8
  Bottom w12: IC6.4 468.5,600.39 R15.1@470.47,598.43
NFAULT0: IC5.2 R12.2 | length 72.1
  Bottom w12: IC5.2 866.33,702.76 883.24,719.66 890.92,719.66 R12.2@905.51,734.25
NFAULT1: IC6.2 R13.2 | length 72.1
  Bottom w12: IC6.2 488.38,702.76 505.29,719.66 512.97,719.66 R13.2@527.56,734.25
OUT1: IC5.6 J2.6 | length 241.4
  Top w12: v4(797.16,570.41) 798.69,568.88 807.93,568.88 836,540.81 836,422.09 J2.6
  Bottom w12: v4(797.16,570.41) 797.24,570.49 IC5.6@797.24,624.1
OUT2: IC5.8 J2.5 | length 222
  Top w10: J2.5 762.94,422.18 v4(762.94,554.25)
  Bottom w12: IC5.8@757.87,624.1 757.87,561.49 762.94,556.42 v4(762.94,554.25)
OUT3: IC6.6 J2.4 | length 506.4
  Top w12: J2.4 651.79,448.82 673.35,470.38 675.97,470.38 683,477.41 683,497 708.66,522.66 v4(708.66,539.37)
  Bottom w12: IC6.6@419.29,633.86 419.29,600.39 456.69,562.99 578.74,562.99 582.68,566.93 613.33,566.93 615.84,564.43 683.61,564.43 v4(708.66,539.37)
OUT4: IC6.8 J2.3 | length 365.9
  Top w12: J2.3@565,460 598.43,493.43 v4(598.43,539.37)
  Bottom w12: IC6.8 379.92,608.27 448.82,539.37 v4(598.43,539.37)
  other v1: 555.12,468.5
P0_PWM: D12.1 IC5.16 JP1.2 | length 162.8
  Bottom w12: IC5.16 816.93,822.58 JP1.2
  Bottom w16: JP1.2 838.58,818.65 873.76,818.65 D12.1
P0_PWM_INT: J1.1 JP1.1 | length 1018.8
  Bottom w10: J1.1 62.99,763.78 318.21,1019 794,1019 834.65,978.35 JP1.1
P1_PWM_INT: J1.2 JP2.1 | length 434.8
  Top w10: J1.2 114.17,714.17 114.17,893.7 204.72,984.25 JP2.1
P2_PWM_INT: J1.3 JP3.1 | length 687.2
  Bottom w10: J1.3 114.17,614.17 114.17,787.4 248.03,921.26 417.32,921.26 456.69,881.89 JP3.1
P6_ADC: JP4.2 R5.2 | length 1991.3
  Top w10: v1(330.71,291.63) 346.17,291.63 417.32,220.47 417.32,26.86 423.18,21 852,21 1189,358 1189,791 1237,839 1237,906 1216,927 R5.2@1130.46,927
  Bottom w10: JP4.2 275.84,314.71 299.21,291.34 330.71,291.34 v1(330.71,291.63)
P6_ADC_INT: J1.7 JP4.1 | length 301.8
  Bottom w10: J1.7 112.6,212.6 112.6,285.83 141.73,314.96 224.15,314.96 224.48,315.29 236.34,315.29 243.84,322.79 JP4.1
P7_PWM: D10.1 IC5.15 JP5.2 | length 198.9
  Bottom w12: JP5.2 797.24,822.58 IC5.15
  Bottom w16: D10.1 685.04,842.52 704.72,822.83 739.91,822.83 JP5.2
P7_PWM_INT: J5.6 JP5.1 | length 1377.3
  Top w5: v1(728,967) 755,994 1180,994 1281.34,892.66 1281.34,502.13 v1(1283.46,500)
  Bottom w5: v1(1283.46,500) 1291.34,492.13 1291.34,340.7 1329.48,302.56 1329.48,272.09 J5.6
  Bottom w10: v1(728,967) 740.16,954.84 JP5.1
P8_PWM: D11.1 IC6.15 JP6.2 | length 198.9
  Bottom w12: JP6.2 419.29,822.58 IC6.15
  Bottom w16: D11.1 318.9,822.83 361.95,822.83 JP6.2
P8_PWM_INT: J5.5 JP6.1 | length 1742.7
  Top w5: v1(311.02,901.57) 426.43,1017 1177,1017 1291.34,902.66 1291.34,535.43 1303.15,523.62 1303.15,496.06 1291.34,484.25 1291.34,410.24 J5.5
  Bottom w10: v1(311.02,901.57) 362.2,901.57 JP6.1
P10_FSYNC: D8.1 IC4.4 JP7.2 R7.2 U1.2 | length 728.2
  Top w8: v2(965,545) 901,481 901,338 922,317 987.85,317 v2(1001.23,330.39) v2@1000,331.62
  Bottom w8: IC4.4 814.66,492.06 814.66,476.33 828,463 878,463 896,481 896,498 909,511 919,511 934.36,526.36 934.36,541.66 R7.2 964,544 v2(965,545) ; D8.1@965,600 v2(965,545) ; JP7.2 1015,560.26 1006.5,551.76 995.76,551.76 989,545 v2(965,545)
  Bottom w16: U1.2@975.02,329.83 1000.13,329.83 1000.69,330.39 v2(1001.23,330.39)
P10_FSYNC_INT: J5.3 JP7.1 | length 334.8
  Bottom w8: JP7.1 1047,566.5 1055.5,558 1178,558 1218,518 1260,518 1270,528 1303.59,528 J5.3
P12_PWM: D13.1 IC6.16 JP2.2 JP3.2 | length 628.2
  Top w5: JP2.2 291.59,933.32 263.78,905.51 263.78,877.95 283.46,858.27 448.82,858.27 v1(496.06,905.51)
  Bottom w10: 496.06,818.65 v1(496.06,905.51)
  Bottom w12: IC6.16 438.98,822.58 JP3.2
  Bottom w16: JP3.2 456.69,818.65 496.06,818.65 499.75,818.65 D13.1
PMODE0: IC5.14 JP10.2 | length 288.1
  Top w10: v1(775.59,779.53) 814.96,818.9 v1(913.39,818.9)
  Bottom w10: v1(775.59,779.53) 777.56,777.56 IC5.14 ; v1(913.39,818.9) 937.01,818.9 937.01,779.53 968.5,779.53 JP10.2
PMODE1: IC6.14 JP11.2 | length 282.5
  Top w10: v1(397.64,779.53) 433.07,814.96 v1(535.43,814.96)
  Bottom w10: v1(397.64,779.53) 399.61,777.56 IC6.14 ; v1(535.43,814.96) 559.06,814.96 559.06,779.53 590.55,779.53 JP11.2
SW: IC1.1 L2.2 | length 80.8
  Bottom w16: L2.2@277.53,245.94 358.12,245.94 IC1.1
SYNC: J2.8 JP9.2 | length 324.6
  Top w18: J2.8 1045.49,420.44 1064.05,439 v2(1102,439)
  Bottom w8: JP9.2 957.43,500.43 972,515 1085,515 1102,498 v2(1102,439)
SYNC_IN: JP9.3 R10.2 | length 183.9
  Bottom w8: R10.2 773.41,448.29 906.09,448.29 906.19,448.39 916.93,448.39 925.43,456.89 JP9.3
SYNC_IN_INT: D7.1 IC4.2 R6.2 R10.1 Z3.1 | length 304.2
  Bottom w8: D7.1@719.9,423.3 R10.1 761,380 790.73,350.27 Z3.1
  Bottom w10: Z3.1 837.81,351.7 R6.2
  Bottom w16: D7.1 D7.1@715.95,427.25 ; Z3.1 IC4.2
SYNC_OUT: JP9.1 R9.2 | length 72.8
  Bottom w10: JP9.1 1053.89,467.63 R9.2@1059.79,473.53
SYNC_OUT_INT: D9.1 R9.1 U1.4 | length 106.8
  Bottom w16: D9.1@1004.67,404.64 1040.1,404.64 ; U1.4@1036.17,355.43 1040.1,359.36 1040.1,404.64 ; R9.1@1059.79,406.61 1057.82,404.64 1040.1,404.64
V_BATT: C4.2 C9.2 C11.2 C18.2 C20.2 IC1.4 IC3.5 IC5.3 IC6.3 R6.1 U1.5 | length 2528
  Top w8: C9.2@1012.54,827.41 IC3.5
  Top w10: v1(574.8,677.17) 590.55,692.91 771.65,692.91 787.4,708.66 787.4,759.84 814.96,787.4 976.38,787.4 ; v1(940.94,688.98) 972.28,688.98 984.09,700.79 984.09,779.68 976.38,787.4 ; C9.2@1012.54,827.41 C9.2 1005.79,820.66 986.66,820.66 976.38,810.38 976.38,787.4
  Top w16: v2(437,41) 824.46,41 v2(1047.24,263.78)
  Layer 3 w16: v1(940.94,688.98) 967.02,688.98 1047.24,608.76 v2(1047.24,263.78)
  Bottom w10: C20.2@527.56,694.88 557.09,694.88 v1(574.8,677.17) ; C18.2@905.51,694.88 935.04,694.88 v1(940.94,688.98)
  Bottom w12: IC6.3 515.75,683.07 C20.2@527.56,694.88 ; IC5.3 893.7,683.07 C18.2@905.51,694.88
  Bottom w16: IC1.4 433.04,80.71 C4.2 436.53,73.29 436.53,42.02 437,41.54 v2(437,41) ; R6.1@900,311.47 900,277.15 909.37,267.78 1049.42,267.78 1065.17,283.53 1065.17,301.24 ; U1.5@1036.17,304.24 1083.41,304.24 C11.2@1087.35,308.18
VCC: C3.2 C10.2 D2.1 IC4.5 IC5.1 IC6.1 J1.8 J4.8 JP10.1 JP11.1 L2.1 R7.1 R12.1 R13.1 Z2.2 | length 3449
  Top w20: Z2.2 1155,616.03 v2(1155,583)
  Layer 3 w10: J1.8 J1.8@73.99,62.99
  Layer 3 w20: J1.8 72.56,72.56 101.85,72.56 142.28,112.99 183.7,112.99 186.71,116 207,116 253,162 253,284.49 v1(555.12,586.61) 590.39,586.61 613,564 678,564 721,607 820,607 v2(873,554) 940.94,621.94 v1(940.94,657.48) 940.46,657 914,657 890,681 890,720 914,744 1073,744 1155,662 v2(1155,583) 1155,146.57 J4.8
  Bottom w8: IC4.5 861.97,538.16 C10.2 R7.1
  Bottom w10: D2.1@226.42,94.42 226.42,91.47 231.27,86.62 D2.1 257.85,86.62 270.72,99.49 270.72,107.36 281.47,118.11 C3.2 ; v1(555.12,586.61) 598.43,629.92 JP11.1 ; v1(940.94,657.48) 980.32,696.85 980.32,735.72 JP10.1
  Bottom w12: IC6.1 468.5,736.22 517.72,785.43 527.56,785.43 531,781.99 559.06,753.94 559.06,748.03 567.43,739.65 JP11.1 ; IC5.1 846.46,736.22 895.67,785.43 905.51,785.43 908.95,781.99 937.01,753.94 937.01,748.03 945.39,739.65 JP10.1
  Bottom w14: J1.8 114.17,114.17 206.67,114.17 D2.1@226.42,94.42
  Bottom w16: L2.1 289.34,167.44 C3.2
VCP0: C14.2 IC5.10 | length 64
  Bottom w12: C14.2@669.29,694.88 681.1,683.07 IC5.10@728.35,683.07
VCP1: C15.2 IC6.10 | length 63.9
  Bottom w12: C15.2@291.34,694.88 303.15,683.07 IC6.10
VIN: D1.1 J5.7 | length 287.1
  Bottom w16: D1.1 1086.71,214 1287.57,214 J5.7
pads on no net: FD1.1 FD2.1 FD3.1 FD4.1 FD5.1 FD6.1 FD7.1 FD8.1 IC1.3 IC1.5 IC4.1 J1.4 J1.5 J1.6 J2.9 J2.10 J3.1 J3.2 J3.3 J3.4 J3.5 J3.6 J3.7 J4.1 J4.2 J4.3 J4.4 J4.5 J4.6 J4.7 J5.1 J5.2 J5.4 U1.1

## Polygon pours and split planes (outlines as drawn)
GND on Bottom "Polygon_1_Net_GND" (solid, remove dead copper, pour order 1): 1.87,1.87 1399.7,1.87 1399.7,1053.24 1.87,1053.24
EXT_VIN_INT on Bottom "Polygon_1_Net_EXT_VIN_INT" (solid, remove dead copper, pour order 0): 544.37,300.28 540.43,300.28 540.43,367.2 495,367.2 495,246.97 544.37,246.97
GND on Layer 2 "Polygon_2_Net_GND" (solid, remove dead copper, pour order 3): -2.06,-2.06 1403.64,-2.06 1403.64,1057.18 -2.06,1057.18
GND on Top "Polygon_2_Net_GND" (solid, remove dead copper, pour order 2): -2.06,-2.06 1403.64,-2.06 1403.64,1057.18 -2.06,1057.18

## Keep-outs
Keep-Out Layer:
  the board outline again, w0

## Silkscreen, mask and mechanical layers (free items; w line width, h text height)
Top Overlay:
  drawing of 262 lines, arcs and shapes, not listed
  text "PWR - 6V to 36V" at 489,999 h27.2
  text "Driver" at 1168.35,964.52 h27.2
  text "P1" at 370.08,960.63 h27.2 r90
  text "AIN - 0 to 5V or 4-20mA" at 487,956 h27.2
  text "Shield" at 1168.35,916.52 h27.2
  text "R2" at 1335,917 h27.2
  text "SYN - 0 to 5V I/O" at 483,909 h27.2
  text "OpenMV" at 58,891 h26.35
  text "+" at 535.43,834.65 h27.2
  text "+" at 913.39,834.65 h27.2
  text "PWR" at 326.08,495.06 h27.2
  text "GND" at 424.5,495.06 h27.2
  text "O4" at 534.74,495.06 h27.2
  text "O3" at 633.17,495.06 h27.2
  text "O2" at 731.59,495.06 h27.2
  text "O1" at 830.02,495.06 h27.2
  text "AIN" at 912.69,495.06 h27.2
  text "SYN" at 1011.12,495.06 h27.2
Bottom Overlay:
  drawing of 1318 lines, arcs and shapes, not listed
  text "Driver Shield R2" at 685.04,992.13 h27.2
  text "https://openmv.io" at 685.04,944.88 h27.2
  text "8.21.23" at 685.04,897.64 h27.2
  text "P8" at 385.83,893.7 h27.2
  text "P2" at 476.38,893.7 h27.2
  text "P7" at 763.78,893.7 h27.2
  text "P0" at 854.33,893.7 h27.2
  text "OpenMV" at 1356.64,860.96 h26.35
  text "L" at 600.81,842.89 h27.2
  text "L" at 978.76,842.89 h27.2
  text "FSYNC" at 1278.08,680.69 h27.2
  text "H" at 600.81,669.66 h27.2
  text "H" at 978.76,669.66 h27.2
  text "P10" at 1210.11,632.69 h27.2
  text "I" at 1074.8,511.81 h27.2
  text "O" at 1137.8,511.81 h27.2
  text "P6" at 220.47,389.76 h27.2 r270
  text "ADC" at 268.47,389.76 h27.2 r270
  text "VIN" at 1248.4,140.68 h27.2 r270
  text "RAW" at 228.35,125.98 h27.2 r270
  text "GND" at 1248.4,37.73 h27.2 r270
  text "GND" at 228.35,23.62 h27.2 r270